# Altium PCB Shift Register Test Board.PcbDoc
Units mil, origin at the board's own origin, x right, y up, seen from the top; angles counter-clockwise.
Board outline 2170 x 3157 mil, 2 copper layers (Top Layer, Bottom Layer); 126 components, 65 nets, 308 pads, 101 vias.
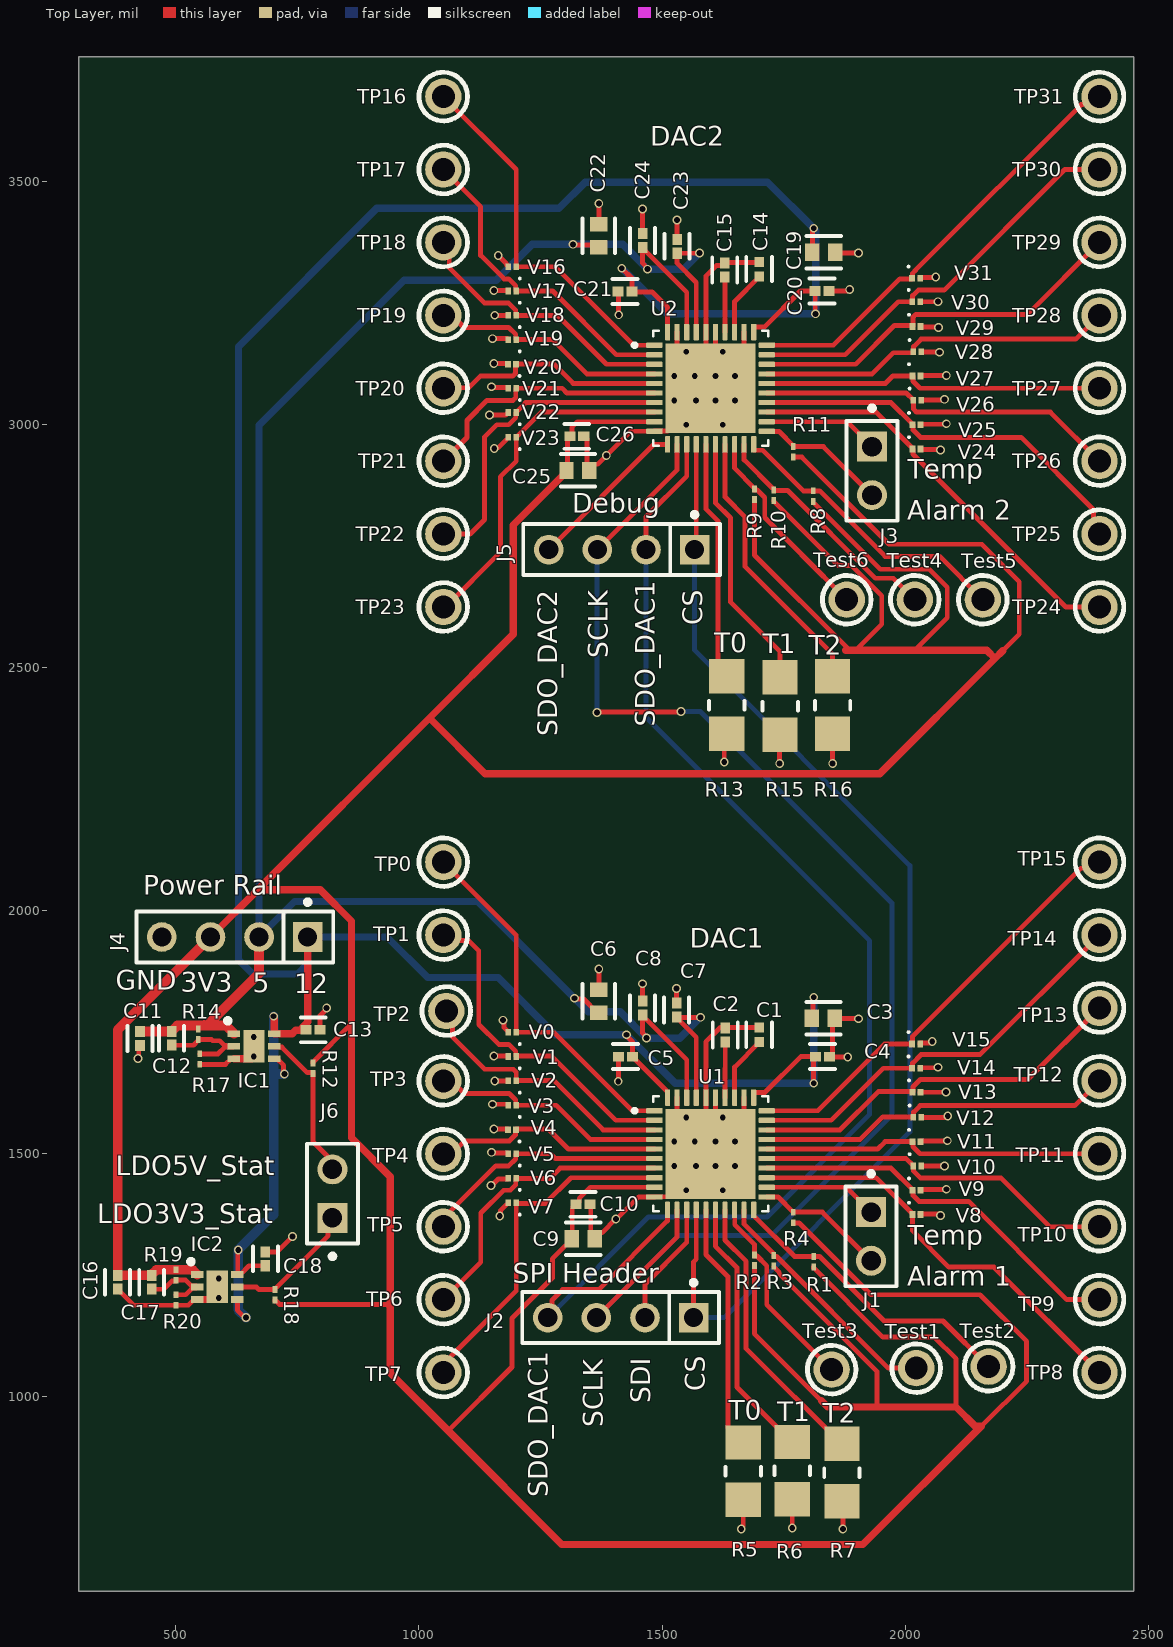
[diagram p0: Top Layer view]
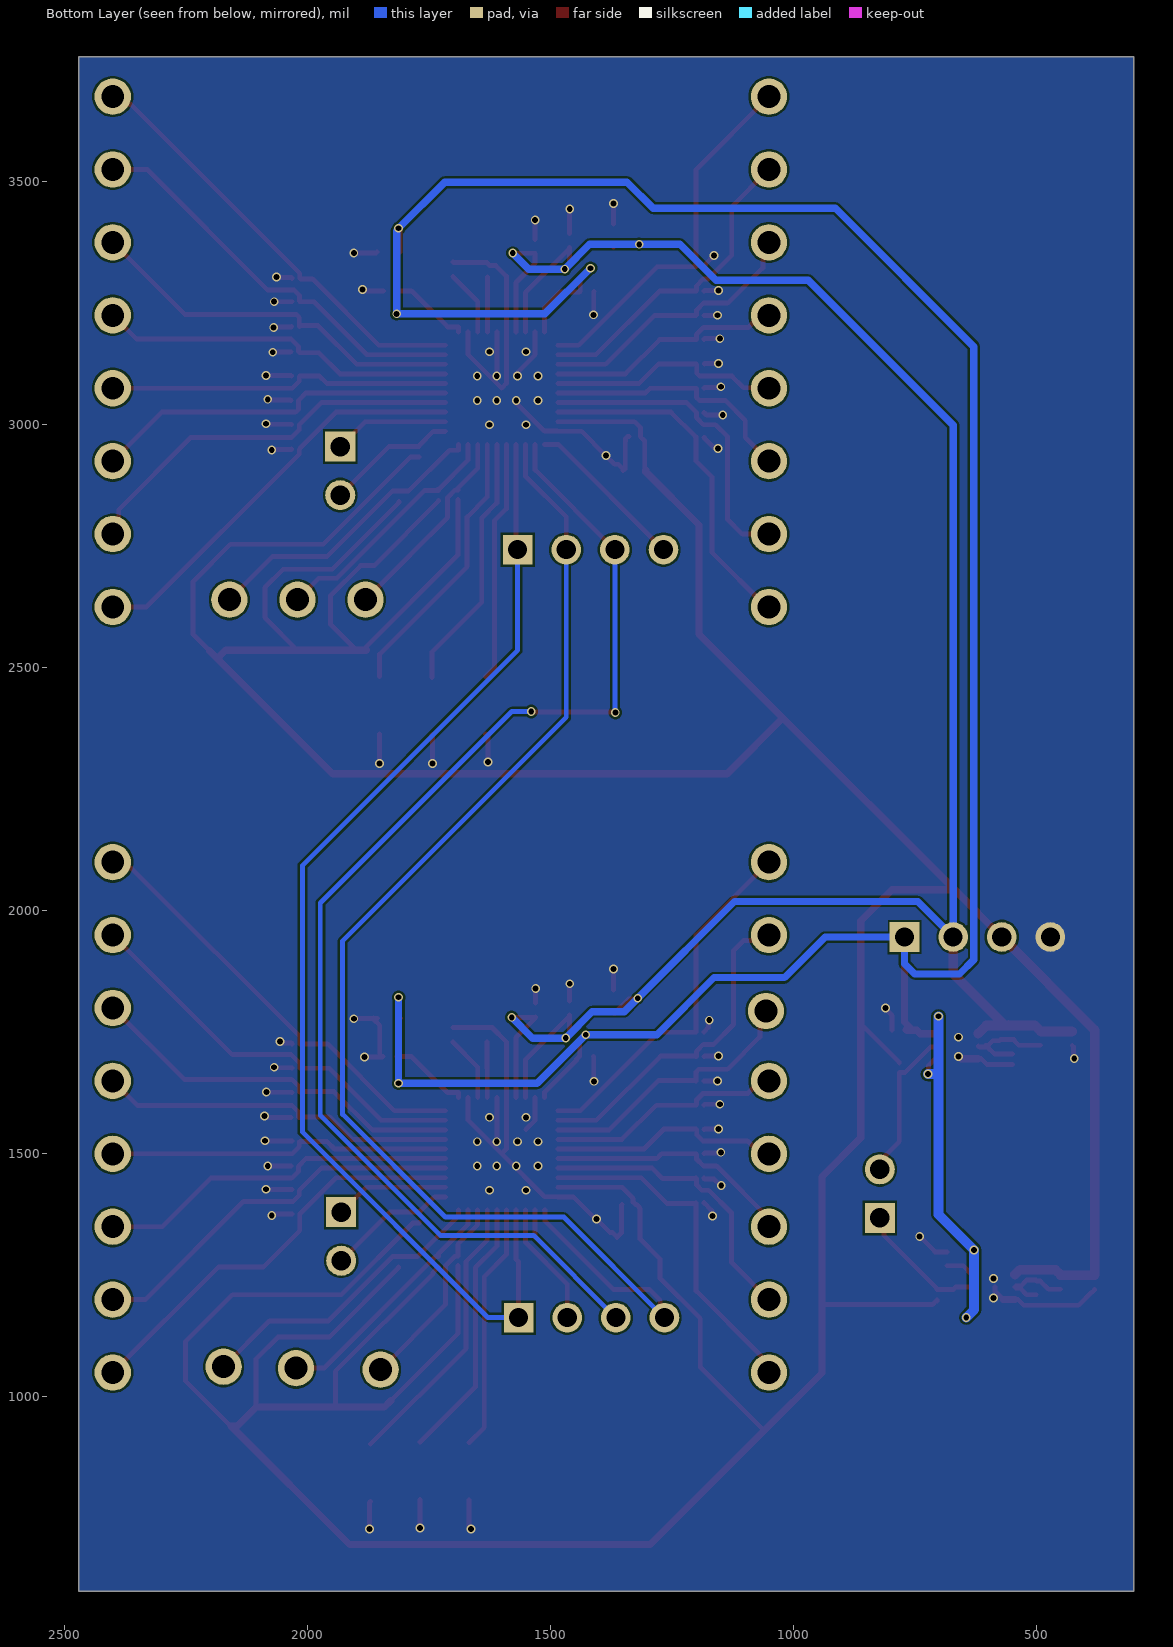
[diagram p1: Bottom Layer view, seen from below]
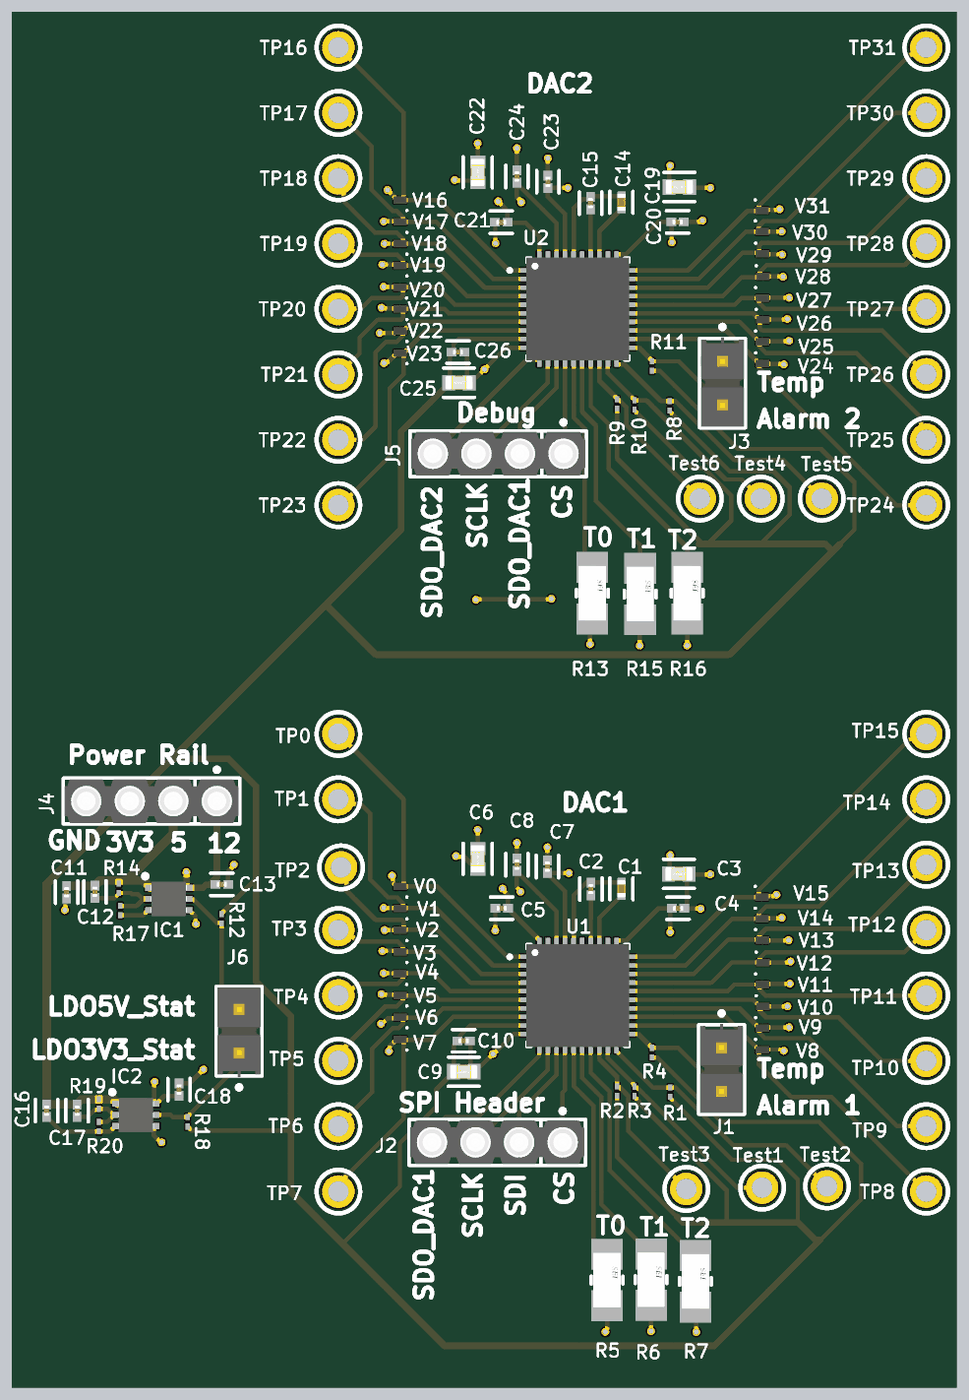
[diagram p2: 3D render of the assembled board from above, using the file's embedded part models]

## Layer stack, top to bottom
Top Solder: solder mask 0.4, Solder Resist, Dk 3.5
Top Layer: signal copper 1.4
Dielectric 1: dielectric 12.6, FR-4, Dk 4.8
Bottom Layer: signal copper 1.4
Bottom Solder: solder mask 0.4, Solder Resist, Dk 3.5

## Board outline
300,600 2470,600 2470,3757 300,3757

## Design rules (kind name [scope] priority, off if disabled: settings)
Clearance Clearance2 [OnLayer('Power')] p1: gap=10 ignorepadtopadclearanceinfootprint=TRUE
Clearance Clearance_1 [All] p2: gap=4.5 ignorepadtopadclearanceinfootprint=TRUE
DiffPairsRouting [All] p1: maxlimit=5 minlimit=4.5 mostfreqgap=4.5 toplayer_minwidth=12.65 toplayer_maxwidth=14.97 toplayer_prefwidth=12.65 bottomlayer_minwidth=12.65 bottomlayer_maxwidth=14.97 bottomlayer_prefwidth=12.65 maxuncoupledlength=500
MinimumSolderMaskSliver [All] p1 off: minsoldermaskwidth=10
PolygonConnect [All] p1: connectstyle=Direct reliefconductorwidth=10 reliefentries=4 polygonreliefangle="90 Angle" airgapwidth=10
RoutingVias [All] p1: holewidth=12 width=24 viastyle="Through Hole" minholewidth=12 minwidth=18 maxholewidth=25 maxwidth=50
SilkToSilkClearance [All] p1 off: silktosilkclearance=10
SilkToSolderMaskClearance [IsPad] p1 off: minsilkscreentomaskgap=10 clearancetoexposedcopper=TRUE
SolderMaskExpansion [All] p1: expansion=4 istentingtop=FALSE
SupplyNets "Schematic Supply Nets_1" [InNet('+12')] p1: voltage=0.000
SupplyNets "Schematic Supply Nets" [InNet('+5')] p2: voltage=0.000
SupplyNets "Schematic Supply Nets_13" [InNet('+3V3')] p3: voltage=0.000
SupplyNets "Schematic Supply Nets_2" [InNet('GND')] p4: voltage=0.000
Width [InNet('+3V3_RF')] p1: maxlimit=14.05 minlimit=14.05 preferedwidth=14.05 minimp=50.000000 maximp=50.000000 favimp=50.000000
Width Width_1 [InNet('NetC47_2')] p2: maxlimit=14.05 minlimit=14.05 preferedwidth=14.05 minimp=50.000000 maximp=50.000000 favimp=50.000000
Width Width2 [InNet('ANT_RF')] p3: maxlimit=14.05 minlimit=14.05 preferedwidth=14.05 minimp=50.000000 maximp=50.000000 favimp=50.000000 // NetC47_2
Width Widthall [All] p4: maxlimit=80 minlimit=4 preferedwidth=15 minimp=50.000000 maximp=50.000000 favimp=50.000000
26 further rules are at their usual default settings.

## Components (designator, comment, footprint, x,y, rotation, side; value= is the part's Value field where it differs from the comment)
C1 "0402 150nF" FP-GRM155-0_1-IPC_C 1700,1744.9 r90 top
C2 "201 330pF" FP-GRM033-0_09-IPC_A 1630,1744.31 r90 top
C3 "603 10uF" FP-C0603C106M8PACTU-MFG 1832,1779 r0 top
C4 "201 0.1uF" FP-GRM033-0_09-IPC_A 1830,1700 r0 top
C5 "201 0.1uF" FP-GRM033-0_09-IPC_A 1425,1700 r180 top
C6 "603 10uF" FP-C0603C106M8PACTU-MFG 1370,1813.62 r90 top
C7 "201 0.1uF" FP-GRM033-0_09-IPC_A 1530,1795.69 r90 top
C8 "201 0.1uF" FP-GRM033-0_09-IPC_A 1460,1800 r90 top
C9 "603 10uF" FP-C0603C106M8PACTU-MFG 1338,1325 r0 top
C10 "201 0.1uF" FP-GRM033-0_09-IPC_A 1337.69,1396 r0 top
C11 "0201 1uF" FP-GRM033-0_09-IPC_A 426,1737 r270 top
C12 "201 1nF" FP-GRM033-0_09-IPC_A 491,1737.69 r270 top
C13 "0201 1uF" FP-GRM033-0_09-IPC_A 782.31,1755 r0 top
C14 "0402 150nF" FP-GRM155-0_1-IPC_C 1700,3320 r90 top
C15 "201 330pF" FP-GRM033-0_09-IPC_A 1629,3318 r90 top
C16 "0201 1uF" FP-GRM033-0_09-IPC_A 380,1235.69 r270 top
C17 "201 1nF" FP-GRM033-0_09-IPC_A 450,1235.69 r270 top
C18 "0201 1uF" FP-GRM033-0_09-IPC_A 684,1284 r90 top
C19 "603 10uF" FP-C0603C106M8PACTU-MFG 1833,3355 r0 top
C20 "201 0.1uF" FP-GRM033-0_09-IPC_A 1829,3275 r0 top
C21 "201 0.1uF" FP-GRM033-0_09-IPC_A 1424,3274 r180 top
C22 "603 10uF" FP-C0603C106M8PACTU-MFG 1370,3388.62 r90 top
C23 "201 0.1uF" FP-GRM033-0_09-IPC_A 1531,3367 r90 top
C24 "201 0.1uF" FP-GRM033-0_09-IPC_A 1460,3379 r90 top
C25 "603 10uF" FP-C0603C106M8PACTU-MFG 1327,2906 r0 top
C26 "201 0.1uF" FP-GRM033-0_09-IPC_A 1324.69,2976 r0 top
IC1 "NCP711BMTADJTBG" SON65P200X200X80-7N 660.66,1721.41 r0 top
IC2 "NCP711BMTADJTBG" SON65P200X200X80-7N 585,1226 r0 top
J1 "Temp + Alarm" FP-TSW-102-12-T-S-MFG 1930,1330 r270 top
J2 "SPI Header" FP-315-43-104-41-003000-MFG 1415,1163 r180 top
J3 "Temp + Alarm" FP-TSW-102-12-T-S-MFG 1932,2905 r270 top
J4 "Power Rail" FP-315-43-104-41-003000-MFG 621,1946 r180 top
J5 "Debug" FP-315-43-104-41-003000-MFG 1417,2743 r180 top
J6 "LDO Status" FP-TSW-102-12-T-S-MFG 822,1418 r90 top
R1 "0201 10k" RESC0603X26X15LL03T05 1812,1278 r270 top
R2 "0201 10k" RESC0603X26X15LL03T05 1690,1280.83 r270 top
R3 "0201 10k" RESC0603X26X15LL03T05 1730,1280 r270 top
R4 "0201 10k" RESC0603X26X15LL03T05 1770,1369.17 r270 top
R5 "0ohm" FP-HCJ1206-MFG 1667,847 r270 top
R6 "0ohm" FP-HCJ1206-MFG 1768,848 r270 top
R7 "0ohm" FP-HCJ1206-MFG 1870,844 r270 top
R8 "0201 10k" RESC0603X26X15LL03T05 1811,2853 r270 top
R9 "0201 10k" RESC0603X26X15LL03T05 1690,2857 r270 top
R10 "0201 10k" RESC0603X26X15LL03T05 1730,2855 r270 top
R11 "0201 10k" RESC0603X26X15LL03T05 1770,2944.17 r270 top
R12 "0201 100k" RESC0603X26X15LL03T05 782,1676 r90 top
R13 "0ohm" FP-HCJ1206-MFG 1633,2423 r270 top
R14 "0201 2.4M" RESC0603X26X15LL03T05 546,1746 r90 top
R15 "0ohm" FP-HCJ1206-MFG 1743,2421 r270 top
R16 "0ohm" FP-HCJ1206-MFG 1851,2423 r270 top
R17 "0201 750K" RESC0603X26X15LL03T05 549,1694.83 r90 top
R18 "0201 100k" RESC0603X26X15LL03T05 704,1210 r270 top
R19 "0201 1.3M" RESC0603X26X15LL03T05 500,1250.83 r90 top
R20 "0201 750K" RESC0603X26X15LL03T05 500,1199.17 r90 top
Test1 "RH-5002" TESTPOINT-TH_BD2.5-D1.2_RH-5002 2023,1059 r0 top
Test2 "RH-5002" TESTPOINT-TH_BD2.5-D1.2_RH-5002 2172,1062 r0 top
Test3 "RH-5002" TESTPOINT-TH_BD2.5-D1.2_RH-5002 1849,1056 r0 top
Test4 "RH-5002" TESTPOINT-TH_BD2.5-D1.2_RH-5002 2020,2640 r90 top
Test5 "RH-5002" TESTPOINT-TH_BD2.5-D1.2_RH-5002 2160,2640 r90 top
Test6 "RH-5002" TESTPOINT-TH_BD2.5-D1.2_RH-5002 1880,2640 r90 top
TP0 "RH-5002" TESTPOINT-TH_BD2.5-D1.2_RH-5002 1050,2100 r90 top
TP1 "RH-5002" TESTPOINT-TH_BD2.5-D1.2_RH-5002 1050,1950 r90 top
TP2 "RH-5002" TESTPOINT-TH_BD2.5-D1.2_RH-5002 1056.2,1793.8 r90 top
TP3 "RH-5002" TESTPOINT-TH_BD2.5-D1.2_RH-5002 1050,1650 r90 top
TP4 "RH-5002" TESTPOINT-TH_BD2.5-D1.2_RH-5002 1050,1500 r90 top
TP5 "RH-5002" TESTPOINT-TH_BD2.5-D1.2_RH-5002 1050,1350 r90 top
TP6 "RH-5002" TESTPOINT-TH_BD2.5-D1.2_RH-5002 1050,1200 r90 top
TP7 "RH-5002" TESTPOINT-TH_BD2.5-D1.2_RH-5002 1050,1050 r0 top
TP8 "RH-5002" TESTPOINT-TH_BD2.5-D1.2_RH-5002 2400,1050 r0 top
TP9 "RH-5002" TESTPOINT-TH_BD2.5-D1.2_RH-5002 2400,1200 r0 top
TP10 "RH-5002" TESTPOINT-TH_BD2.5-D1.2_RH-5002 2400,1350 r0 top
TP11 "RH-5002" TESTPOINT-TH_BD2.5-D1.2_RH-5002 2400,1500 r0 top
TP12 "RH-5002" TESTPOINT-TH_BD2.5-D1.2_RH-5002 2400,1650 r0 top
TP13 "RH-5002" TESTPOINT-TH_BD2.5-D1.2_RH-5002 2400,1800 r0 top
TP14 "RH-5002" TESTPOINT-TH_BD2.5-D1.2_RH-5002 2400,1950 r0 top
TP15 "RH-5002" TESTPOINT-TH_BD2.5-D1.2_RH-5002 2400,2100 r0 top
TP16 "RH-5002" TESTPOINT-TH_BD2.5-D1.2_RH-5002 1050,3675 r90 top
TP17 "RH-5002" TESTPOINT-TH_BD2.5-D1.2_RH-5002 1050,3525 r90 top
TP18 "RH-5002" TESTPOINT-TH_BD2.5-D1.2_RH-5002 1050,3375 r90 top
TP19 "RH-5002" TESTPOINT-TH_BD2.5-D1.2_RH-5002 1050,3225 r90 top
TP20 "RH-5002" TESTPOINT-TH_BD2.5-D1.2_RH-5002 1050,3075 r90 top
TP21 "RH-5002" TESTPOINT-TH_BD2.5-D1.2_RH-5002 1050,2925 r90 top
TP22 "RH-5002" TESTPOINT-TH_BD2.5-D1.2_RH-5002 1050,2775 r90 top
TP23 "RH-5002" TESTPOINT-TH_BD2.5-D1.2_RH-5002 1050,2625 r90 top
TP24 "RH-5002" TESTPOINT-TH_BD2.5-D1.2_RH-5002 2400,2625 r90 top
TP25 "RH-5002" TESTPOINT-TH_BD2.5-D1.2_RH-5002 2400,2775 r90 top
TP26 "RH-5002" TESTPOINT-TH_BD2.5-D1.2_RH-5002 2400,2925 r90 top
TP27 "RH-5002" TESTPOINT-TH_BD2.5-D1.2_RH-5002 2400,3075 r90 top
TP28 "RH-5002" TESTPOINT-TH_BD2.5-D1.2_RH-5002 2400,3225 r90 top
TP29 "RH-5002" TESTPOINT-TH_BD2.5-D1.2_RH-5002 2400,3375 r90 top
TP30 "RH-5002" TESTPOINT-TH_BD2.5-D1.2_RH-5002 2400,3525 r90 top
TP31 "RH-5002" TESTPOINT-TH_BD2.5-D1.2_RH-5002 2400,3675 r90 top
U1 "DAC61416RHAT" DAC61416RHAT 1600,1500 r0 top
U2 "DAC61416RHAT" DAC61416RHAT 1600,3075 r0 top
V0 "MAVR-011020-1411" MAVR-011020-1411 1191.76,1750 r180 top
V1 "MAVR-011020-1411" MAVR-011020-1411 1191.76,1700 r180 top
V2 "MAVR-011020-1411" MAVR-011020-1411 1191.76,1650 r180 top
V3 "MAVR-011020-1411" MAVR-011020-1411 1191.76,1600 r180 top
V4 "MAVR-011020-1411" MAVR-011020-1411 1191.31,1549.55 r180 top
V5 "MAVR-011020-1411" MAVR-011020-1411 1191.76,1500 r180 top
V6 "MAVR-011020-1411" MAVR-011020-1411 1191.76,1450 r180 top
V7 "MAVR-011020-1411" MAVR-011020-1411 1191.76,1399.02 r180 top
V8 "MAVR-011020-1411" MAVR-011020-1411 2023.67,1375.09 r0 top
V9 "MAVR-011020-1411" MAVR-011020-1411 2023.67,1425.09 r0 top
V10 "MAVR-011020-1411" MAVR-011020-1411 2025,1475 r0 top
V11 "MAVR-011020-1411" MAVR-011020-1411 2023.67,1525.09 r0 top
V12 "MAVR-011020-1411" MAVR-011020-1411 2025,1575 r0 top
V13 "MAVR-011020-1411" MAVR-011020-1411 2023.67,1626.91 r0 top
V14 "MAVR-011020-1411" MAVR-011020-1411 2022.76,1676 r0 top
V15 "MAVR-011020-1411" MAVR-011020-1411 2022.76,1726 r0 top
V16 "MAVR-011020-1411" MAVR-011020-1411 1191.76,3325 r180 top
V17 "MAVR-011020-1411" MAVR-011020-1411 1191.76,3275 r180 top
V18 "MAVR-011020-1411" MAVR-011020-1411 1191.76,3225 r180 top
V19 "MAVR-011020-1411" MAVR-011020-1411 1191.76,3175 r180 top
V20 "MAVR-011020-1411" MAVR-011020-1411 1191.31,3124.55 r180 top
V21 "MAVR-011020-1411" MAVR-011020-1411 1191.76,3075 r180 top
V22 "MAVR-011020-1411" MAVR-011020-1411 1191.76,3025 r180 top
V23 "MAVR-011020-1411" MAVR-011020-1411 1191.76,2974.02 r180 top
V24 "MAVR-011020-1411" MAVR-011020-1411 2023.67,2950.09 r0 top
V25 "MAVR-011020-1411" MAVR-011020-1411 2023.67,3000.09 r0 top
V26 "MAVR-011020-1411" MAVR-011020-1411 2025,3050 r0 top
V27 "MAVR-011020-1411" MAVR-011020-1411 2023.67,3100.09 r0 top
V28 "MAVR-011020-1411" MAVR-011020-1411 2025,3150 r0 top
V29 "MAVR-011020-1411" MAVR-011020-1411 2023.67,3201.91 r0 top
V30 "MAVR-011020-1411" MAVR-011020-1411 2023,3253 r0 top
V31 "MAVR-011020-1411" MAVR-011020-1411 2022.76,3301 r0 top

## Footprints (in the part's own frame and the unit in brackets; to place one, negate y for a bottom-side part, rotate by r counter-clockwise, add the part's x,y. Pads: shape width x height; smd on the part's side, far side on the other; paste and mask are expansions set on the pad)
DAC61416RHAT [mm]
  rrect25% 0.86x0.27 smd: 1(-2.935,2.25) 2(-2.935,1.75) 3(-2.935,1.25) 4(-2.935,0.75) 5(-2.935,0.25) 6(-2.935,-0.25) 7(-2.935,-0.75) 8(-2.935,-1.25) 9(-2.935,-1.75) 10(-2.935,-2.25) 21(2.935,-2.25) 22(2.935,-1.75) 23(2.935,-1.25) 24(2.935,-0.75) 25(2.935,-0.25) 26(2.935,0.25) 27(2.935,0.75) 28(2.935,1.25) 29(2.935,1.75) 30(2.935,2.25)
  rrect25% 0.27x0.86 smd: 11(-2.25,-2.935) 12(-1.75,-2.935) 13(-1.25,-2.935) 14(-0.75,-2.935) 15(-0.25,-2.935) 16(0.25,-2.935) 17(0.75,-2.935) 18(1.25,-2.935) 19(1.75,-2.935) 20(2.25,-2.935) 31(2.25,2.935) 32(1.75,2.935) 33(1.25,2.935) 34(0.75,2.935) 35(0.25,2.935) 36(-0.25,2.935) 37(-0.75,2.935) 38(-1.25,2.935) 39(-1.75,2.935) 40(-2.25,2.935)
  rect 4.7x4.7 smd paste-3: 41(0,0)
  silkscreen extent -4.07,-3 3,3, body extent -3,-3 3,3, height 1
FP-315-43-104-41-003000-MFG [mm]
  rect 1.55x1.55 hole 1 paste-2539.97 mask+0: 1(-3.81,0)
  round 1.55 hole 1 paste-2539.97 mask+0: 2(-1.27,0) 3(1.27,0) 4(3.81,0)
  silkscreen extent -5.14,-1.95 5.14,1.33, body extent -5.24,-1.43 5.24,1.43, height 0.25
FP-C0603C106M8PACTU-MFG [mm]
  rect 0.75x0.9 smd paste+0 mask+0: 1(-0.6,0) 2(0.6,0)
  silkscreen extent -0.9,-0.85 0.9,0.85, body extent -1.2,-0.6 1.2,0.6, height 0.25
FP-GRM033-0_09-IPC_A [mil]
  rect 22.7x19.82 smd paste+0 mask+0: 1(-14.31,0) 2(14.31,0)
  silkscreen extent -26,-26 26,26, body extent -34,-18 34,18, height 10
FP-GRM155-0_1-IPC_C [mil]
  rect 20.29x18.6 smd paste+0 mask+0: 1(-14.9,0) 2(14.9,0)
  silkscreen extent -25,-27 25,27, body extent -29,-15 29,15, height 10
FP-HCJ1206-MFG [mm]
  rect 1.8x1.84 smd paste+0 mask+0: 1(-1.5,0) 2(1.5,0)
  silkscreen extent -0.23,-0.92 0.23,0.92, body extent -2.5,-1.02 2.5,1.02, height 0.25
FP-TSW-102-12-T-S-MFG [mm]
  rect 1.57x1.57 hole 1.02 paste-2539.97 mask+0: 1(-1.27,0)
  round 1.57 hole 1.02 paste-2539.97 mask+0: 2(1.27,0)
  silkscreen extent -3.4,-1.34 2.61,1.34, body extent -2.71,-1.44 2.71,1.44, height 0.25
MAVR-011020-1411 [mm] "DFN, 2-Leads, Body 0.41x0.76mm, Pitch 0.42mm, IPC Medium Density"
  rect 0.3x0.35 smd: 1(-0.209,0) 2(0.209,0)
  silkscreen extent -0.45,0.57 -0.35,0.66, body extent -0.39,-0.22 0.39,0.22, height 0.22
RESC0603X26X15LL03T05 [mm] "Chip Resistor, 2-Leads, Body 0.60x0.30mm, IPC High Density"
  rect 0.35x0.25 smd: 1(-0.275,0) 2(0.275,0)
  body extent -0.32,-0.16 0.31,0.17, height 0.26
SON65P200X200X80-7N [mm]
  rect 0.65x0.35 smd: 1(-1.05,0.65) 2(-1.05,0) 3(-1.05,-0.65) 4(1.05,-0.65) 5(1.05,0) 6(1.05,0.65)
  rect 1.1x1.7 smd: 7(0,0)
  silkscreen extent -1.5,1.2 -1.25,1.45, body extent -1.05,-1 1.05,1, height 0.8
TESTPOINT-TH_BD2.5-D1.2_RH-5002 [mm]
  round 1.9 hole 1.2: 1(0,0)
  silkscreen extent -1.27,-1.27 1.27,1.27

## Part data
C1 C14: library part CMP-06035-040691-1, "C5448879"
C2 C15: library part CMP-06035-000463-1, "C3899460", Capacitance=1uF, Case/Package=0201, Max Operating Temperature=105°C, Min Operating Temperature=-55°C, Tolerance=20%, Voltage Rating=6.3V, Mount="Surface Mount", Packaging="Tape and Reel"
C3 C6 C9 C19 C22 C25: library part CMP-03020-034654-1, "C194427", RoHS Compliant=Yes
C4 C5 C7 C8 C10 C20 C21 C23 C24 C26: library part CMP-06035-000463-1, "C181043", Capacitance=1uF, Case/Package=0201, Max Operating Temperature=105°C, Min Operating Temperature=-55°C, Tolerance=20%, Voltage Rating=6.3V, Mount="Surface Mount", Packaging="Tape and Reel"
C11 C13 C16 C18: library part CMP-06035-000463-1, "C335102", Capacitance=1uF, Case/Package=0201, Max Operating Temperature=105°C, Min Operating Temperature=-55°C, Tolerance=20%, Voltage Rating=6.3V, Mount="Surface Mount", Packaging="Tape and Reel"
C12 C17: library part CMP-06035-000463-1, "C85934", Capacitance=1uF, Case/Package=0201, Max Operating Temperature=105°C, Min Operating Temperature=-55°C, Tolerance=20%, Voltage Rating=6.3V, Mount="Surface Mount", Packaging="Tape and Reel"
IC1 IC2: "C893333", Manufacturer_Name=onsemi, Mouser Part Number=863-NCP711BMTADJTBG, Arrow Part Number=NCP711BMTADJTBG, Arrow Price/Stock=https://www.arrow.com/en/products/ncp711bmtadjtbg/on-semiconductor?region=nac, Datasheet Link=https://www.onsemi.com/pub/Collateral/NCP711-D.PDF, Height=0.8mm, Manufacturer_Part_Number=NCP711BMTADJTBG, Mouser Price/Stock=https://www.mouser.co.uk/ProductDetail/onsemi/NCP711BMTADJTBG?qs=W%2FMpXkg%252BdQ46oCoLBtghiQ%3D%3D
J1 J3 J6: library part CMP-02766-001444-1, "CONN HEADER VERT 2POS 2.54MM", Contact Material=Bronze, Contact Plating=Tin, Gender=Male, Mount="Through Hole", Number of Contacts=2, Number of Rows=1, Packaging=Bulk, Pitch=2.54mm, Radiation Hardening=No, REACH SVHC="No SVHC", RoHS Compliant=Yes, Termination=Solder
J2 J4 J5: library part CMP-00254-30991456-1, "315-43-104-41-003000 4 Position Receptacle Connector 0.100 (2.54mm) Through Hole Gold\"", Color=Black, Current Rating=3A, Max Operating Temperature=125°C, Min Operating Temperature=-55°C, Voltage Rating=150V, Connector Type="Receptacle, Socket", Contact Material="Gold, Nickel", Contact Plating=Gold, Height=2.667mm, Mount="Through Hole", Number of Contacts=4, Number of Positions=4, Number of Rows=1, Packaging=Bulk, Pitch=2.54mm, RoHS=Compliant, Termination=Solder
R1 R2 R3 R4 R8 R9 R10 R11: library part CMP-2004-03568-1, "C106225", Manufacturer="TE Connectivity / AMP", Part Number=CRG0201F10K
R5 R6 R7 R13 R15 R16: library part CMP-26527-002752-1, "C17888", Case Code (Imperial)=1206, Case Code (Metric)=3216, Max Operating Temperature=155°C, Min Operating Temperature=-55°C, Package Quantity=5000, Resistance=0mR, Case/Package=1206, Features="Automotive AEC-Q200", Height=0.026inch, Length=0.122inch, Mount="Surface Mount", Number of Terminations=2, Packaging="Tape and Reel", Radiation Hardening=No, RoHS Compliant=Yes, Termination=Wraparound, Width=0.061inch
R12 R18: library part CMP-2004-03568-1, "C106224", Manufacturer="TE Connectivity / AMP", Part Number=CRG0201F10K
R14: library part CMP-2004-03568-1, "C423649", Manufacturer="TE Connectivity / AMP", Part Number=CRG0201F10K
R17 R20: library part CMP-2004-03568-1, "C158358", Manufacturer="TE Connectivity / AMP", Part Number=CRG0201F10K
R19: library part CMP-2004-03568-1, "C307090", Manufacturer="TE Connectivity / AMP", Part Number=CRG0201F10K
Test1 Test2 Test3 Test4 Test5 Test6 TP0 TP1 TP2 TP3 TP4 TP5 TP6 TP7 TP8 TP9 TP10 TP11 TP12 TP13 TP14 TP15 TP16 TP17 TP18 TP19 TP20 TP21 TP22 TP23 TP24 TP25 TP26 TP27 TP28 TP29 TP30 TP31: "C5199802", JLCPCB Part Class="Extended Part", LCSC Part Name=PCB电路板测试点/测试针, Manufacturer=荣和, Plastic Color=White, Add into BOM=yes, Board Space (Diameter φ/ Length x Width)=2.5mm, Connector Type="Pin Type (Through-Board)", Convert to PCB=yes, Datasheet=https://item.szlcsc.com/datasheet/RH-5002/5885638.html, Device=RH-5002, Manufacturer Part=RH-5002, Supplier=LCSC, Supplier Footprint=-, Supplier Part=C5199802, Symbol=RH-5002

## Via types
v1: diameter 18, hole 12, Top Layer to Bottom Layer, 101 vias

## Nets (pads, with @x,y where several pads share a name; then routed paths per layer and width w, separated by ;. In a path a pad name is that pad's centre, name@x,y a point inside that pad or via, vN(x,y) a via of type N, cw(c..) or ccw(c..) an arc to the next point about the centre after c; other vN are vias at no path point)
+3V3: C9.1 C10.1 C16.1 C17.1 C25.1 C26.1 IC2.1 J4.3 R1.2 R2.2 R3.2 R4.2 R8.2 R9.2 R10.2 R11.2 R12.2 R18.2 R19.2 U1.9 U2.9 | length 12266.8
  Top Layer w10: R18.2 704,1197.36 704.08,1197.28 705.89,1197.28 713.17,1190 934.14,1190 941.07,1183.07 ; R12.2 782,1688.64 860,1766.64 ; 1060,930 1191.35,1061.35 1191.35,1161.35 1274.51,1244.51 1274.51,1284.18 1315.38,1325.05 1315.38,1387.99 1317.04,1389.65 1317.04,1391.09 1321.95,1396 C10.1 ; C25.1@1305.54,2906 1305.54,2967.84 C26.1@1305.69,2968 ; C26.1@1307.14,2968 1314.43,2975.29 1314.43,2994.43 1326.1,3006.1 U2.9 ; C10.1@1324.83,1396 1329.74,1400.91 1329.74,1408.44 1352.41,1431.1 U1.9 ; R2.2 1690,1130 1828,992 ; R9.2 1690,2732 1882,2540 ; R10.2 1730,2842.36 1862.36,2710 1890,2710 1952,2648 1952,2589.39 1897.61,2535 ; R3.2@1730.08,1267.28 1741.08,1256.28 1741.08,1253.17 1942,1052.25 1942,979 ; R4.2 1770,1357.68 1770.08,1357.61 1782.39,1357.61 1930,1210 2154.14,1210 2250,1114.14 2250,1032 2158.16,940.16 ; R11.2 1787.65,2933.35 1967,2754 2158,2754 2235,2677 2235,2569 2201,2535 ; R8.2 1811,2840.36 1948.86,2702.5 2049.5,2702.5 2086.86,2665.14 2086.86,2602.86 2019,2535 ; R1.2 1812,1265.36 1812.16,1265.2 1954.36,1123 2060,1123 2105,1078 2105,979
  Top Layer w15: J4.3 668,2043 ; C25.1 1303.38,2903.05 1194,2793.67 1194,2569 1021.5,2396.5 ; 1828,992 1841,979 1942,979 2105,979 2144.5,939.5 2156.5,939.5 1913,696 1294,696 1060,930 941.07,1048.93 941.07,1452.93 861,1533 861,1979 797,2043 668,2043 ; 1878,2536 2168,2536 2185,2519 ; 2201,2535 2185,2519 ; 668,2043 1021.5,2396.5 ; 1021.5,2396.5 1136,2282 1948,2282 2185,2519
  Top Layer w20: C17.1 C16.1 380,1755 J4.3 ; C17.1@450,1251.26 460.13,1261.39 534.18,1261.39 IC2.1@543.66,1251.91
+5: C6.1 C7.1 C8.1 C11.1 C12.1 C22.1 C23.1 C24.1 IC1.1 J4.2 R14.2 U1.37 U1.38 U2.37 U2.38 | length 4751.2
  Top Layer w10: 551.18,1763.82 557.59,1770.23 ; v1(1317,3371) 1318.53,3369.47 1365.53,3369.47 C22.1 ; v1(1320,1820) 1321.53,1818.47 1338.58,1818.47 1367.05,1790 C6.1 ; C8.1@1460,1784.25 1550.79,1693.46 U1.38 ; C8.1 1460,1748.16 1468,1740.16 v1(1468,1738) ; C24.1@1460,3363.25 1550.79,3272.46 U2.38 ; C24.1 1460,3332.16 1470,3322.16 v1(1470,3320) ; C7.1@1530,1779.95 1570.47,1739.47 U1.37 ; C7.1 1530.69,1780.69 v1(1579.31,1780.69) ; U2.37 1570.47,3292.53 1531,3332 C23.1 1531.15,3352.85 1576.85,3352.85 v1(1577,3353)
  Top Layer w20: C11.1@426.09,1751.65 490.65,1751.65 502.82,1763.82 551.18,1763.82 564,1763.82 ; IC1.1 619.32,1747.31 602.82,1763.82 564,1763.82 ; J4.2 671,1870.82 564,1763.82
  Bottom Layer w15: v1(1577,3353) 1544,3320 v1(1470,3320) 1419,3371 v1(1317,3371) 1233,3371 1159,3297 969,3297 671,2999 J4.2 744,2019 1121,2019 v1(1320,1820) 1348,1792 1414,1792 v1(1468,1738) 1536.61,1738 v1(1579.31,1780.69)
+12: C3.1 C4.1 C5.1 C13.1 C18.1 C19.1 C20.1 C21.1 IC1.4 IC1.6 IC2.4 IC2.6 J4.1 U1.31 U1.40 U2.31 U2.40 | length 6871.3
  Top Layer w10: IC2.4 626.34,1178.52 641.86,1163 v1(644,1163) ; v1(628,1302) 627.17,1301.17 627.17,1252.42 IC2.6 632.24,1251.59 650.35,1269.69 C18.1 ; IC1.4 707.91,1695.82 721.47,1682.26 721.47,1665.53 v1(723,1664) ; v1(1417,3322) 1438.31,3300.69 C21.1 1439.31,3273 1480,3273 1511.42,3241.58 U2.40 ; v1(1427,1745) 1427,1742.84 1439.31,1730.53 C5.1 ; C5.1@1440.75,1700 1445.66,1695.09 1445.66,1692.93 1511.42,1627.17 U1.40 ; U1.31 1688.58,1625.84 1688.9,1626.15 1711.53,1626.15 1785.38,1700 C4.1 1812,1696.31 v1(1812,1645) ; U2.31 1688.58,3200.84 1688.9,3201.15 1711.03,3201.15 1784.88,3275 C20.1 1815.35,3274.35 1815.35,3228.65 v1(1816,3228) ; C3.1 1810.47,1781.09 1810.47,1820.47 v1(1812,1822) ; C19.1 1809.38,3399.21 1812,3401.84 v1(1812,3404)
  Top Layer w15: v1@701.98,1782.02 701.57,1781.61 702,1781.19 IC1.6 739,1747 745.96,1753.96 766.96,1753.96 C13.1 ; C13.1@760.78,1760.78 771,1771 J4.1
  Bottom Layer w15: v1(1417,3322) 1511,3228 v1(1816,3228) ; v1(1812,1822) v1(1812,1645) 1527,1645 v1(1427,1745) 1280.5,1745 1163,1862.5 1017.81,1862.5 934.31,1946 J4.1 771,1891 750,1870 658,1870 628.49,1899.51 628.49,3160.49 913,3445 1288,3445 1342,3499 1717,3499 v1(1812,3404) 1812,3403.19 1816,3399.19 v1@1816,3228.81
  Bottom Layer w20: v1(644,1163) 628,1179 v1(628,1302) 701,1375 701,1664 ; v1(701,1783) 701,1664 ; v1(723,1664) 701,1664
AlarmDAC1: J1.2 R4.1 U1.21 | length 268.9
  Top Layer w10: U1.21 1738.58,1411.42 R4.1 1830,1380 J1.2
AlarmDAC2: J3.2 R11.1 U2.21 | length 271.9
  Top Layer w10: U2.21 1715.87,2986.1 1740.71,2986.1 1770,2956.81 R11.1 1832,2955 J3.2
CS: J2.1 J5.1 U1.14 U2.14 | length 2426.3
  Top Layer w10: J2.1 1565,1277.94 1570.47,1283.41 U1.14 ; J5.1 1570.47,2746.47 U2.14
  Bottom Layer w10: J2.1 1628,1163 2010,1545 2010,2093 1567,2536 J5.1
GND: C1.2 C2.2 C3.2 C4.2 C5.2 C6.2 C7.2 C8.2 C9.2 C10.2 C11.2 C13.2 C14.2 C15.2 C16.2 C18.2 C19.2 C20.2 C21.2 C22.2 C23.2 C24.2 C25.2 C26.2 IC1.3 IC1.7 IC2.3 IC2.7 J4.4 R5.2 R6.2 R7.2 R13.2 R15.2 R16.2 R17.1 R20.1 U1.10 U1.32 U1.35 U1.36 U1.39 U1.41 U2.10 U2.32 U2.35 U2.36 U2.39 U2.41 V0.2 V1.2 V2.2 V3.2 V4.2 V5.2 V6.2 V7.2 V8.2 V9.2 V10.2 V11.2 V12.2 V13.2 V14.2 V15.2 V16.2 V17.2 V18.2 V19.2 V20.2 V21.2 V22.2 V23.2 V24.2 V25.2 V26.2 V27.2 V28.2 V29.2 V30.2 V31.2 | length 4820.8
  Top Layer w10: C16.2 380,1219.95 384.91,1215.04 386.35,1215.04 413.04,1188.35 R20.1 525.69,1188.35 537.76,1200.41 IC2.3 ; v1(422,1696) 423.53,1697.53 423.53,1720.22 C11.2 ; R17.1 601.6,1684 613.42,1695.82 IC1.3 ; IC2.7@568.35,1200.41 585,1217.06 IC2.7 ; IC1.7@655.82,1695.82 v1(660,1700) ; C18.2 708.31,1298.31 v1(740,1330) ; C13.2 796.61,1784.45 810,1797.84 v1(810,1800) ; v1(1145,3020) 1178.52,3020 1181.63,3023.11 1182.62,3023.11 1183.52,3024.02 V22.2 ; v1(1148,1435) 1150.16,1435 1163.28,1448.11 1182.62,1448.11 1183.52,1449.02 V6.2 ; v1(1149,1503) 1150.5,1501.5 1182.62,1501.5 1183.52,1500.59 V5.2 ; v1(1149,3078) 1150.5,3076.5 1182.62,3076.5 1183.52,3075.59 V21.2 ; v1(1151,1602) 1181.52,1602 1181.63,1601.89 1182.62,1601.89 1183.52,1600.98 V3.2 ; v1(1151,3177) 1181.52,3177 1181.63,3176.89 1182.62,3176.89 1183.52,3175.98 V19.2 ; v1(1154,1551) 1182.62,1551 1183.52,1550.09 V4.2@1183.52,1550 ; v1(1154,1701) 1182.62,1701 1183.52,1700.09 V1.2 ; v1(1154,3126) 1182.17,3126 1183.07,3125.09 V20.2 ; v1(1154,3276) 1182.62,3276 1183.52,3275.09 V17.2 ; v1(1155,2951) 1156.53,2952.53 1163.02,2952.53 1182.62,2972.13 1182.62,2973.11 V23.2 ; v1(1156,1650) V2.2 ; v1(1156,3225) V18.2 ; v1(1163,3348) 1179.97,3331.03 1179.97,3329.54 1183.52,3325.98 V16.2 ; v1(1166,1372) 1167.53,1373.53 1167.53,1383.02 V7.2 V7.2@1183.52,1400 ; v1(1173,1775) 1174.53,1773.47 1174.53,1759.98 1183.52,1750.98 V0.2 ; C26.2@1337.61,2975.39 1341.05,2975.39 1345.35,2971.09 1345.35,2965.63 1345.75,2965.23 C25.2@1345.75,2908.95 ; C25.2 1350.62,2908.95 1360.39,2918.72 1367.72,2918.72 v1(1385.47,2936.47) 1435.42,2986.42 U2.10 1484.76,2986.73 1511.73,2986.73 U2.41@1572.5,3047.5 ; C10.2 1353.44,1394.56 1353.44,1337.18 1362.62,1328 1362.62,1328.95 1371.39,1337.72 1376.72,1337.72 v1(1405,1366) 1407.1,1366 1452.52,1411.42 U1.10 1484.76,1411.73 1511.73,1411.73 U1.41 ; C6.2 v1(1370,1880) ; C22.2 v1(1370,3455) ; C21.2 1410.35,3273.35 1410.35,3226.65 v1(1411,3226) ; v1(1410,1649) 1410.35,1649.35 1410.35,1699.65 C5.2 ; C8.2 v1(1460,1850) ; C24.2 v1(1460,3444) ; C7.2 v1(1530,1840) ; C23.2 v1(1531,3421) ; U1.39 1531.1,1568.9 U1.41@1550,1550 ; U2.39 1531.1,3143.9 U2.41@1571.25,3103.75 ; U1.41@1609.84,1525 U1.35 ; U2.41@1609.84,3100 U2.35 ; v1(1628,2306) 1628,2358.94 R13.2 ; v1(1663,728) 1663,730.16 1667,734.16 R5.2 ; U1.32 1668.9,1568.9 U1.41 ; U2.32 1668.9,3143.9 U2.41 1590.16,3084.84 U2.36 1590.16,3305.62 1611.68,3327.15 1624.09,3327.15 1629,3332.06 C15.2 1630.3,3333.6 1698.7,3333.6 C14.2 ; C1.2 1619.81,1759.81 1590.16,1730.16 U1.36 1590.16,1509.84 U1.41 ; v1(1742,2303) 1742,2360.94 R15.2 ; v1(1768,730) R6.2 ; C20.2 1880.84,3275 1883.84,3278 v1(1886,3278) ; C4.2 1844.81,1699.5 1881.5,1699.5 v1(1882,1699) ; C4.2@1845.75,1700 1850.66,1704.91 1850.66,1764.08 1863.62,1777.05 C3.2@1863.62,1778 ; v1(1851,2303) R16.2 ; C3.2 1856.62,1778 C3.2@1863.62,1778 ; C19.2 1858.62,3353 v1(1904,3353) ; C3.2@1863.62,1780 C3.2@1863.62,1778 ; R7.2 1872,782.94 v1(1872,728) ; v1(1904,1778) C3.2@1863.62,1778 ; V8.2@2031,1376 2067.84,1376 2070.84,1373 v1(2073,1373) ; V13.2@2031,1626 2031.5,1626.5 2083.5,1626.5 v1(2084,1627) ; V14.2 2031,1676.15 2031.91,1677.06 2066.94,1677.06 v1(2068,1678.11) ; V15.2 2031,1726.98 2031.91,1727.89 2050.72,1727.89 2053.84,1731 v1(2056,1731) ; V31.2 2031,3301.59 2031.91,3302.5 2061.5,3302.5 v1(2063,3304) ; V30.2 2031.29,3253.06 2067.94,3253.06 v1(2068,3253.11) ; V9.2@2031.5,1426.5 2084.5,1426.5 v1(2085,1427) ; V11.2@2031.5,1526.5 2086.5,1526.5 v1(2087,1527) ; V24.2 2031.91,2949.95 2032.81,2949.05 2071.95,2949.05 v1(2073,2948) ; V25.2 2032.81,3001.05 2084.05,3001.05 v1(2085,3002) ; V27.2 2032.81,3101 v1(2085,3101) ; V29.2 2032.81,3200.95 2068.05,3200.95 v1(2069,3200) ; V10.2 v1(2081,1475) ; V12.2 2082.84,1575 2085.84,1578 v1(2088,1578) ; V26.2 2033.24,3050.15 2034.14,3051.06 2079.94,3051.06 v1(2081,3052.11) ; V28.2 2033.74,3149.5 2070.5,3149.5 v1(2071,3149)
  Top Layer w15: IC2.3 IC2.7@568.35,1200.41 ; IC1.3 IC1.7@655.82,1695.82
  other v1: 588.04,1203.32 588.04,1243.32 1550,1425 1625,1425 1525,1475 1570,1475 1610,1475 1650,1475 1525,1525 1567.5,1525 1610,1525 1650,1525 1550,1575 1625,1575 660,1740 1550,3000 1625,3000 1525,3050 1570,3050 1610,3050 1650,3050 1525,3100 1567.5,3100 1610,3100 1650,3100 1550,3150 1625,3150
LDO_3V3: IC2.5 J6.1 R18.1 | length 282.9
  Top Layer w10: IC2.5 665.5,1226 670.67,1220.83 R18.1 704,1222.64 813.09,1331.73 813.09,1342.09 J6.1@839,1368
LDO_5V: IC1.5 J6.2 R12.1 | length 325.1
  Top Layer w10: IC1.5 703.89,1719.52 717.86,1719.52 770.31,1667.06 781.92,1667.06 782,1666.98 782,1525 J6.2@839,1468
NetC1_1: C1.1 U1.33 | length 135.5
  Top Layer w10: U1.33 1649.21,1678.37 1700,1729.16 C1.1
NetC2_1: C2.1 U1.34 | length 114.6
  Top Layer w10: U1.34 1629.53,1675.17 1630,1675.64 C2.1
NetC12_2: C12.2 IC1.2 R14.1 R17.2 | length 200.9
  Top Layer w10: C12.2 536.03,1723.39 546,1733.36 R14.1 572.87,1735.17 575.54,1732.5 589.91,1732.5 599.11,1723.3 604.22,1723.3 ; R17.2 586.58,1705.65 600.44,1719.52 617.43,1719.52 IC1.2
NetC14_1: C14.1 U2.33 | length 135.6
  Top Layer w10: U2.33 1649.21,3253.46 1700,3304.25 C14.1
NetC15_1: C15.1 U2.34 | length 113.4
  Top Layer w10: C15.1 1629.26,3303.43 1629.26,3190.82 U2.34
NetC17_2: C17.2 IC2.2 R19.1 R20.2 | length 158.5
  Top Layer w10: C17.2 474.91,1221.39 491.63,1238.11 499.92,1238.11 500,1238.19 R19.1 520.08,1240 532.19,1227.89 541.77,1227.89 IC2.2 541.77,1224.11 534.19,1224.11 520.08,1210 R20.2
NetR1_1: R1.1 Test2.1 U1.20 | length 623.8
  Top Layer w10: U1.20 1688.58,1372.83 1772.59,1288.83 R1.1 1812.08,1288.75 1824.25,1288.75 1957,1156 2078,1156 Test2.1
NetR2_1: R2.1 Test3.1 U1.18 | length 414.4
  Top Layer w10: U1.18 1649.53,1384.13 1649.53,1354.02 1690,1313.54 R2.1 1690,1289.84 1690.08,1289.76 1695.48,1289.76 1715.5,1269.75 1715.5,1263.17 1715.58,1263.09 1715.58,1189.42 Test3.1
NetR3_1: R3.1 Test1.1 U1.19 | length 509
  Top Layer w10: U1.19 1668.9,1355.15 1729.92,1294.13 1729.92,1290.91 R3.1 1730,1289.02 1730.08,1288.94 1735.48,1288.94 1965.42,1059 Test1.1
NetR8_1: R8.1 Test5.1 U2.20 | length 610.5
  Top Layer w10: U2.20 1688.58,2947.83 1688.9,2947.52 1707.23,2947.52 1790.92,2863.83 1824.17,2863.83 1959,2729 2071,2729 Test5.1
NetR9_1: R9.1 Test6.1 U2.18 | length 418.2
  Top Layer w10: U2.18 1649.21,2910.43 1690,2869.64 R9.1 1690,2866.02 1690.08,2865.94 1695.48,2865.94 1711.24,2850.18 1711.24,2809 1787,2733.24 1787,2733 Test6.1
NetR10_1: R10.1 Test4.1 U2.19 | length 503.7
  Top Layer w10: U2.19 1668.9,2927.52 1728.7,2867.72 1729.92,2867.72 1730,2867.64 1730,2864.92 1730.08,2864.85 1758.15,2864.85 1939,2684 1976,2684 Test4.1
SCLK: J2.3 J5.3 U1.12 U2.12 | length 2898.4
  Top Layer w10: J2.3 1531.1,1329.1 U1.12 ; v1(1366,2408) 1367,2409 1538,2409 v1(1539,2410) ; J5.3 1531.1,2907.1 U2.12
  Bottom Layer w10: J2.3 1534,1332 1726,1332 1973,1579 1973,2016 1579,2410 v1(1539,2410) ; v1(1366,2408) 1366.5,2408.5 1366.5,2742.5 J5.3
SDI: J2.2 U1.13 | length 257
  Top Layer w10: J2.2 1465,1231.93 1550.79,1317.71 U1.13
SDO_DAC1: J2.4 J5.2 U1.11 U2.13 | length 2805.7
  Top Layer w10: J2.4 1273.68,1171.68 1273.68,1198.68 1295.56,1220.56 1369.56,1220.56 1511.1,1362.1 1511.1,1384.13 U1.11 ; J5.2 1467,2810.43 1550.79,2894.21 U2.13
  Bottom Layer w10: J2.4 1472,1370 1716,1370 1927,1581 1927,1938 1467,2398 J5.2
SDO_DAC2: J5.4 U2.11 | length 334.1
  Top Layer w10: J5.4 1483.45,2959.45 U2.11
TemperatureDAC1: J1.1 U1.22 | length 235.6
  Top Layer w10: U1.22 1878.9,1431.1 J1.1
TemperatureDAC2: J3.1 U2.22 | length 237.6
  Top Layer w10: U2.22 1880.9,3006.1 J3.1
Toggle0_1: R5.1 U1.15 | length 510.7
  Top Layer w10: U1.15 1590.16,1292.84 1635.78,1247.22 1635.78,936.49 1666.21,906.06 R5.1
Toggle0_2: R13.1 U2.15 | length 495.1
  Top Layer w10: U2.15 1590.16,2826.84 1615,2802 1615,2500.06 R13.1
Toggle1_1: R6.1 U1.16 | length 543.4
  Top Layer w10: U1.16 1609.84,1310.16 1654,1266 1654,1020.27 1767.21,907.06 R6.1
Toggle1_2: R15.1 U2.16 | length 534.5
  Top Layer w10: U2.16 1609.84,2839.16 1641,2808 1641,2635 1743,2533 R15.1
Toggle2_1: R7.1 U1.17 | length 581.5
  Top Layer w10: U1.17 1629.53,1322.47 1673,1279 1673,1099.27 1869.21,903.06 R7.1
Toggle2_2: R16.1 U2.17 | length 569.1
  Top Layer w10: U2.17 1629.53,2851.47 1671,2810 1671,2708 1851,2528 R16.1
"Varactor Diode 0": TP0.1 U1.1 V0.1 | length 763.4
  Top Layer w10: TP0.1 1200,1950 V0.1 1277,1750 1438.42,1588.58 U1.1
"Varactor Diode 1": TP1.1 U1.2 V1.1 | length 687.8
  Top Layer w10: TP1.1 1061.4,1938.6 1102.4,1938.6 1123,1918 1123,1766 1164,1725 1184.75,1725 1199.09,1710.66 1199.09,1700.91 V1.1 ; V1.1@1200,1700.09 1200.91,1701 1273,1701 1405.1,1568.9 U1.2
"Varactor Diode 2": TP2.1 U1.3 V2.1 | length 564.6
  Top Layer w10: TP2.1 1068.6,1781.4 1068.6,1740.4 1135,1674 1194.14,1674 1200,1668.14 V2.1 ; V2.1@1200,1650.98 1277.02,1650.98 1378.79,1549.21 U1.3
"Varactor Diode 3": TP3.1 U1.4 V3.1 | length 490.1
  Top Layer w10: TP3.1 1067.54,1650 1093.41,1624.13 1185.62,1624.13 1199.09,1610.66 1199.09,1600.91 V3.1 1282,1600 1352.47,1529.53 U1.4
"Varactor Diode 4": TP4.1 U1.5 V4.1 | length 478.1
  Top Layer w10: TP4.1 1067.54,1500 1094.08,1526.54 1186.3,1526.54 1198.64,1538.89 1198.64,1548.64 V4.1 ; V4.1@1199.55,1550.09 1200.45,1551 1266,1551 1307.16,1509.84 U1.5
"Varactor Diode 5": TP5.1 U1.6 V5.1 | length 516.3
  Top Layer w10: TP5.1 1050,1367 1158,1475 1184.75,1475 1199.09,1489.34 1199.09,1499.09 V5.1 1271,1500 1280.84,1490.16 U1.6
"Varactor Diode 6": TP6.1 U1.7 V6.1 | length 614.1
  Top Layer w10: TP6.1 1127.14,1277.14 1127.14,1378.14 1174,1425 1188,1425 1199.09,1436.09 1199.09,1449.09 V6.1 ; V6.1@1200,1449.91 1200.91,1449 1269,1449 1290.47,1470.47 U1.7
"Varactor Diode 7": TP7.1 U1.8 V7.1 | length 717.7
  Top Layer w10: TP7.1 1050,1067.54 1068.05,1085.59 1068.05,1086.05 1200,1218 1200,1398.91 1200.91,1398 1260,1398 1312.79,1450.79 U1.8
"Varactor Diode 8": TP8.1 U1.23 V8.1 | length 870.7
  Top Layer w10: U1.23 1940.72,1450.79 2015.43,1376.08 V8.1 2015.43,1341.57 2090,1267 2183,1267 TP8.1
"Varactor Diode 9": TP9.1 U1.24 V9.1 | length 802.8
  Top Layer w10: U1.24 1971.04,1470.47 2015.43,1426.08 V9.1 2016.33,1424.19 2016.33,1414.44 2028.77,1402 2131,1402 2333,1200 TP9.1
"Varactor Diode 10": TP10.1 U1.25 V10.1 | length 748.8
  Top Layer w10: U1.25 2002.59,1490.16 2016.76,1475.98 V10.1 2017.67,1474.09 2017.67,1464.34 2032.01,1450 2198,1450 2298,1350 TP10.1
"Varactor Diode 11": TP11.1 U1.26 V11.1 | length 706.9
  Top Layer w10: U1.26 1943.84,1509.84 1959.09,1525.09 V11.1 2016.33,1524.19 2016.33,1514.44 2030.77,1500 TP11.1
"Varactor Diode 12": TP12.1 U1.27 V12.1 | length 740.5
  Top Layer w10: U1.27 1907.53,1529.53 1953.98,1575.98 V12.1@2016.76,1575.98 ; V12.1 2017.67,1575.91 2017.67,1585.66 2031.01,1599 2349,1599 TP12.1
"Varactor Diode 13": TP13.1 U1.28 V13.1 | length 795.1
  Top Layer w10: U1.28 1866.21,1549.21 1945,1628 2014.52,1628 2015.43,1627.09 V13.1 2016.33,1627.81 2016.33,1637.56 2031.77,1653 2253,1653 TP13.1
"Varactor Diode 14": TP14.1 U1.29 V14.1 | length 848
  Top Layer w10: U1.29 1847.9,1568.9 1955,1676 V14.1 2015.43,1676.91 2015.43,1686.66 2032.77,1704 2154,1704 TP14.1
"Varactor Diode 15": TP15.1 U1.30 V15.1 | length 904.8
  Top Layer w10: U1.30 1820.58,1588.58 1958,1726 V15.1 2015.43,1726.91 2015.43,1741.43 2361.6,2087.6 2387.6,2087.6 TP15.1
"Varactor Diode 16": TP16.1 U2.1 V16.1 | length 763.4
  Top Layer w10: TP16.1 1200,3525 V16.1 1280,3325 1441.42,3163.58 U2.1
"Varactor Diode 17": TP17.1 U2.2 V17.1 | length 656.6
  Top Layer w10: TP17.1 1126.65,3448.35 1126.65,3348.35 1175,3300 1184.75,3300 1198.93,3285.82 1198.93,3281.8 1199.09,3281.63 1199.09,3275.91 V17.1 1275,3275 1406.1,3143.9 U2.2
"Varactor Diode 18": TP18.1 U2.3 V18.1 | length 567.5
  Top Layer w10: TP18.1 1062.4,3362.6 1062.4,3322.6 1135,3250 1184.75,3250 1199.09,3235.66 1199.09,3225.91 V18.1 1285,3225 1385.79,3124.21 U2.3
"Varactor Diode 19": TP19.1 U2.4 V19.1 | length 490.1
  Top Layer w10: TP19.1 1067.54,3225 1092.54,3200 1184.75,3200 1199.09,3185.66 1199.09,3175.91 V19.1 1275,3175 1345.47,3104.53 U2.4
"Varactor Diode 20": TP20.1 U2.5 V20.1 | length 482.2
  Top Layer w10: TP20.1 1051.13,3076.13 1102.4,3076.13 1126.27,3100 1192.78,3100 1198.64,3105.86 1198.64,3123.64 1200,3125 1277,3125 1317.16,3084.84 U2.5
"Varactor Diode 21": TP21.1 U2.6 V21.1 | length 531.8
  Top Layer w10: TP21.1 1098.7,2973.7 1098.7,3008.7 1140,3050 1193.24,3050 1199.09,3055.86 1199.09,3074.09 V21.1 1294.49,3075 1304.34,3065.16 U2.6
"Varactor Diode 22": TP22.1 U2.7 V22.1 | length 651.4
  Top Layer w10: TP22.1 1105,2775 1135,2805 1135,2975 1160,3000 1184.75,3000 1199.09,3014.34 1199.09,3024.09 V22.1 ; V22.1@1200,3025.98 1219.49,3045.47 U2.7
"Varactor Diode 23": TP23.1 U2.8 V23.1 | length 719.6
  Top Layer w10: TP23.1 1055,2625 1167.5,2737.5 1167.5,2892.5 1200,2925 V23.1 ; V23.1@1200,2975 1200.91,2975.91 1201.89,2975.91 1251.77,3025.79 U2.8
"Varactor Diode 24": TP24.1 U2.23 V24.1 | length 856.8
  Top Layer w10: U2.23 1940.72,3025.79 2015.43,2951.08 V24.1 2016.33,2949.19 2016.33,2939.44 2330.77,2625 TP24.1
"Varactor Diode 25": TP25.1 U2.24 V25.1 | length 825
  Top Layer w10: U2.24 1971.04,3045.47 2015.43,3001.08 V25.1 2016.33,2999.19 2016.33,2989.44 2031.77,2974 2239,2974 2387.6,2825.4 2387.6,2787.4 TP25.1
"Varactor Diode 26": TP26.1 U2.25 V26.1 | length 753.2
  Top Layer w10: U2.25 2002.59,3065.16 2016.76,3050.98 V26.1 2017.67,3049.09 2017.67,3031.86 2023.52,3026 2299,3026 TP26.1
"Varactor Diode 27": TP27.1 U2.26 V27.1 | length 706.9
  Top Layer w10: U2.26 1959.84,3084.84 1975.09,3100.09 V27.1 2016.33,3099.19 2016.33,3089.44 2030.77,3075 TP27.1
"Varactor Diode 28": TP28.1 U2.27 V28.1 | length 740.6
  Top Layer w10: U2.27 1932.53,3104.53 1976,3148 2014.76,3148 2014.87,3148.11 2015.85,3148.11 2016.76,3149.02 V28.1 2017.67,3150.91 2017.67,3160.66 2033.01,3176 2351,3176 TP28.1
"Varactor Diode 29": TP29.1 U2.28 V29.1 | length 801.4
  Top Layer w10: U2.28 1898.21,3124.21 1978,3204 2013.33,3204 2013.54,3203.8 2014.52,3203.8 2015.43,3202.89 V29.1 2016.33,3202.81 2016.33,3221.14 2022.19,3227 2252,3227 TP29.1
"Varactor Diode 30": TP30.1 U2.29 V30.1 | length 849.2
  Top Layer w10: U2.29 1876.9,3143.9 1986,3253 V30.1 2015.67,3253.91 2015.67,3265.67 2027,3277 2080.73,3277 2328.73,3525 TP30.1
"Varactor Diode 31": TP31.1 U2.30 V31.1 | length 902.1
  Top Layer w10: U2.30 1852.58,3163.58 1989,3300 2013.62,3300 2014.52,3300.91 V31.1 2015.43,3301.91 2015.43,3311.66 2021.16,3317.39 2362.33,3658.56 2366.03,3658.56 2382.46,3675 TP31.1

## Polygon pours and split planes (outlines as drawn)
GND on Bottom Layer "GND_L02_P000" (solid, pour order 0): 300,3757 2470,3757 2470,600.69 300,600.69

## Silkscreen, mask and mechanical layers (free items; w line width, h text height)
Top Overlay:
  text "DAC2" at 1475.69,3573.4 h40
  text "Temp" at 2006,2888.33 h40
  text "Debug" at 1315,2818.33 h40
  text "Alarm 2" at 2005,2804 h40
  text "CS" at 1583,2587 h40 r90
  text "T0" at 1607.37,2532.31 h40
  text "T1" at 1707.37,2529.31 h40
  text "T2" at 1801.37,2526.31 h40
  text "SCLK" at 1388,2520 h40 r90
  text "SDO_DAC1" at 1485.34,2379 h40 r90
  text "SDO_DAC2" at 1284.34,2359 h40 r90
  text "DAC1" at 1556.87,1923.8 h40
  text "GND" at 376,1837 h40
  text "3V3" at 510,1833 h40
  text "5" at 658,1832 h40
  text "12" at 743,1830 h40
  text "LDO5V_Stat" at 376,1455.66 h40
  text "LDO3V3_Stat" at 338,1356.66 h40
  text "Temp" at 2006,1313.33 h40
  text "Alarm 1" at 2005,1229 h40
  text "CS" at 1588,1012 h40 r90
  text "SDI" at 1476,987 h40 r90
  text "T0" at 1637,953 h40
  text "T1" at 1737,950 h40
  text "T2" at 1831,947 h40
  text "SCLK" at 1378,937 h40 r90
  text "SDO_DAC1" at 1265.34,793 h40 r90